# EAGLE board ATX_VGA_Analog_Board (EAGLE 9.6.2)
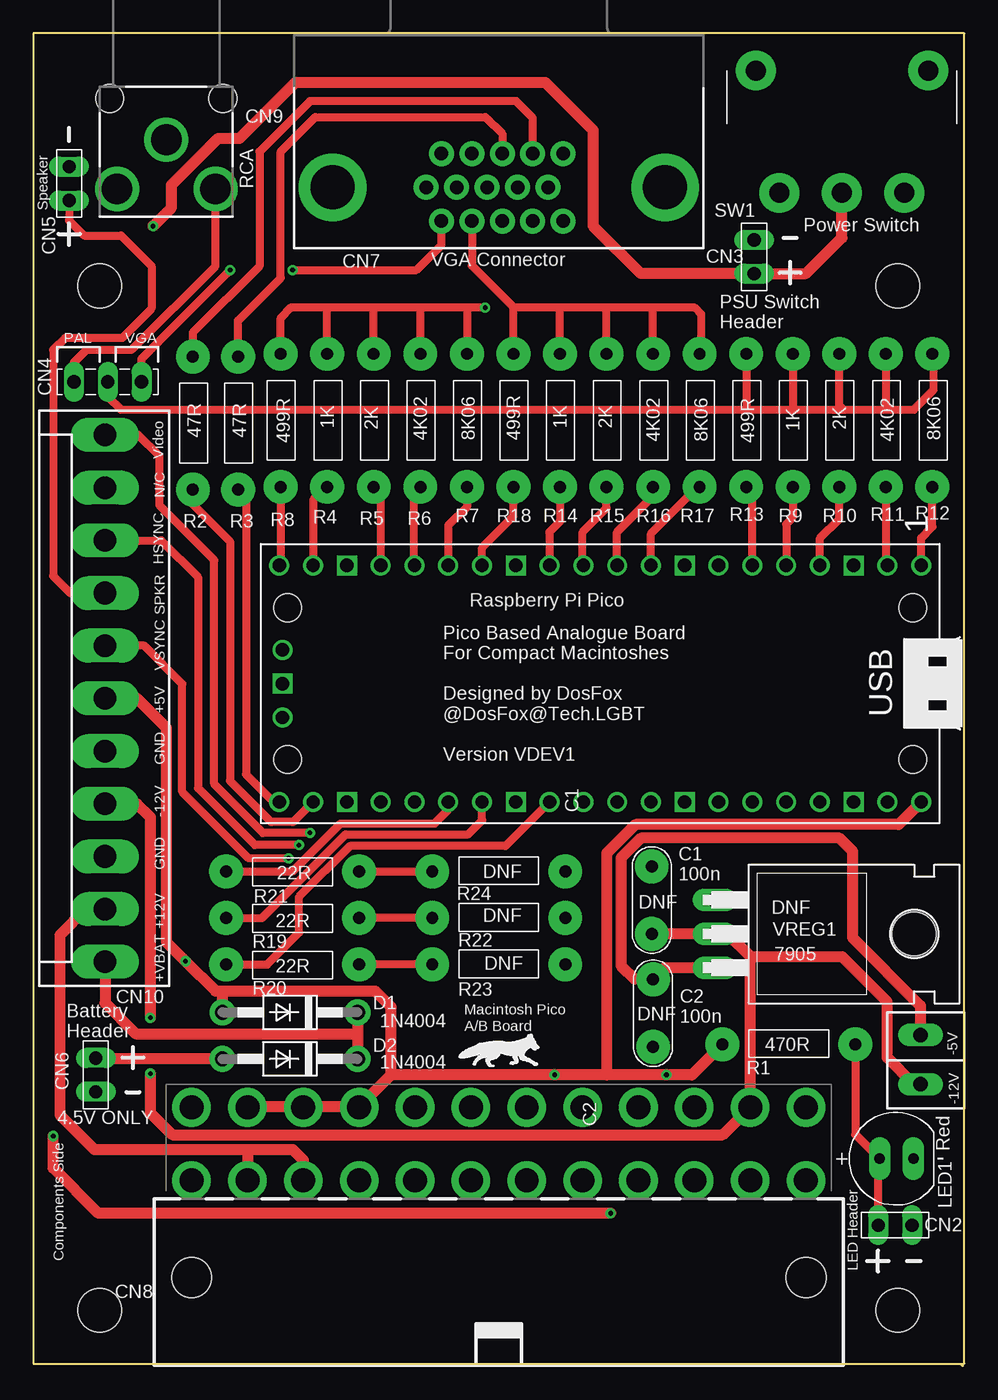
[diagram p0: board, top side]
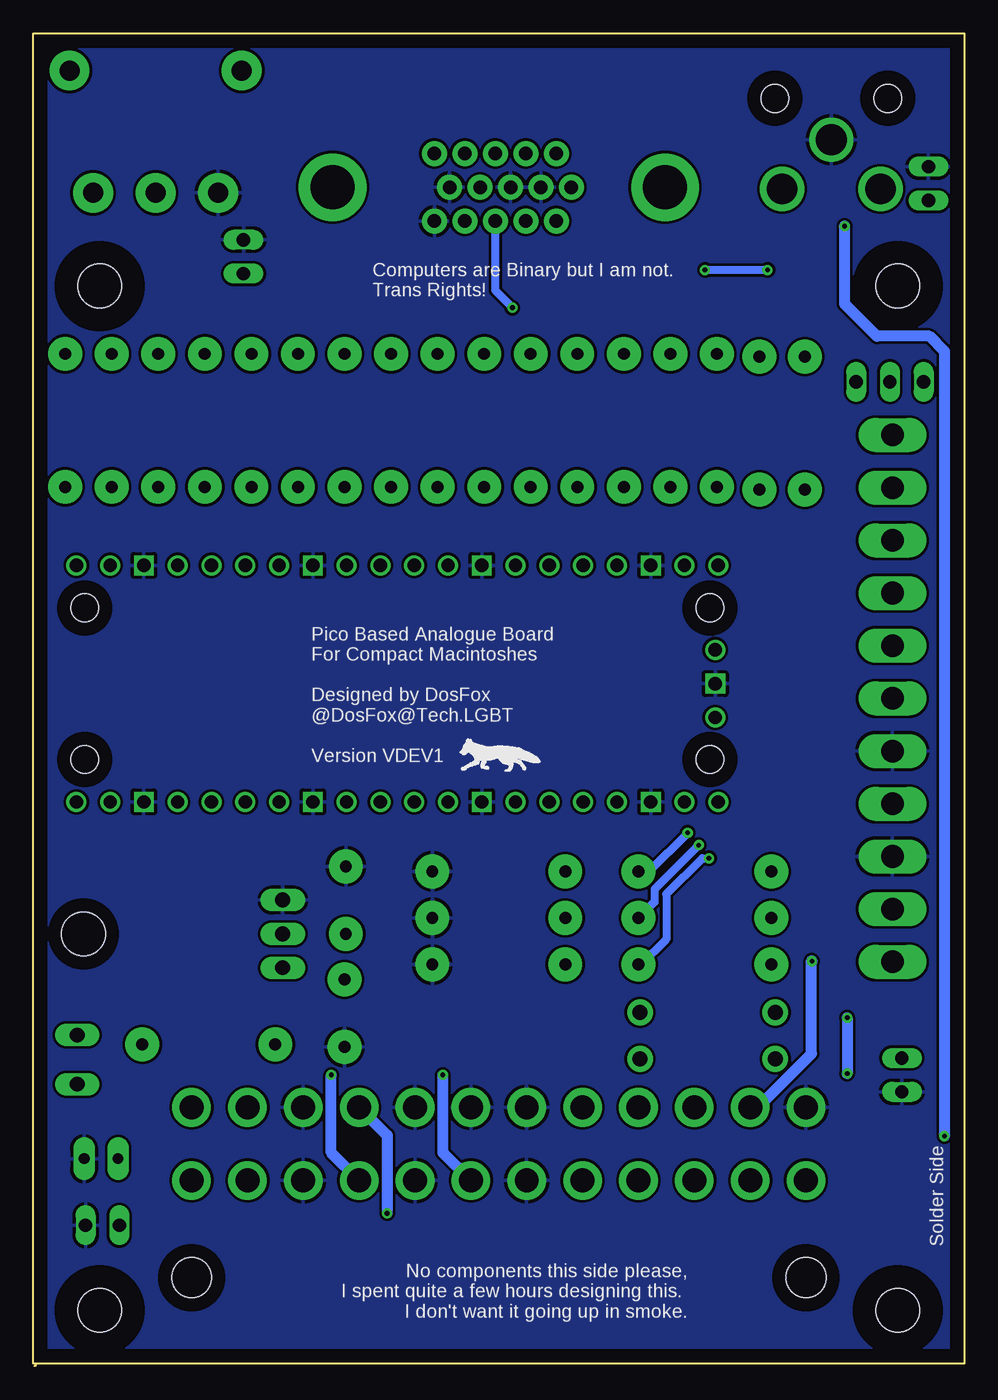
[diagram p1: board, bottom side, seen from below]

Size 70 x 100.2 mm. Coordinates in mm from the lower left corner, seen from the top.
Outline: 69.8,0.1 69.9,0
Outline: 0,0.2 70,0.2 70,100.2 0,100.2 0,0.2
Copper layers (1*16): Top 0.035mm / dielectric 1.5mm / Bottom 0.035mm
Design rules "default *": minimum track width 0.2mm, minimum drill 0.25mm, track to track 8mil, track to pad 8mil, pad to pad 8mil, via to via 8mil, smd to smd 8mil, copper to edge 40mil, drill to drill 8mil, minimum pad ring 1mil, minimum via ring 8mil, stop-mask expansion 4mil, vias tented up to drill 1mm, thermal gap 10mil
Holes 3.3 mm at 65,4.2 5,4.2 5,81.2 65,81.2
bRestrict: area 61.8,0.9 to 68.2,7.5; area 1.8,0.9 to 8.2,7.5; area 1.8,78 to 8.2,84.5; area 61.8,78 to 68.2,84.5

## Footprints (pad centres in the part's own frame; a part is rotated, then mirrored left to right if it is on the bottom)
CAP_5.08MM_PITCH = drill 0.9 pad 2.54: P$1 0,0; P$2 0,-5.08
PICO_SOCKET = drill 1: P1 0,48.26; P2 0,45.72; P4 0,40.64; P5 0,38.1; P6 0,35.56; P7 0,33.02; P9 0,27.94; P10 0,25.4; P11 0,22.86; P12 0,20.32; P14 0,15.24; P15 0,12.7; P16 0,10.16; P17 0,7.62; P19 0,2.54; P20 0,0; P21 17.78,0; P22 17.78,2.54; P24 17.78,7.62; P25 17.78,10.16; P26 17.78,12.7; P27 17.78,15.24; P29 17.78,20.32; P30 17.78,22.86; P31 17.78,25.4; P32 17.78,27.94; P34 17.78,33.02; P35 17.78,35.56; P36 17.78,38.1; P37 17.78,40.64; P39 17.78,45.72; P40 17.78,48.26; P41 6.35,0.23; P43 11.43,0.23 | drill 1 square: P3 0,43.18; P8 0,30.48; P13 0,17.78; P18 0,5.08; P23 17.78,5.08; P28 17.78,17.78; P33 17.78,30.48; P38 17.78,43.18; P42 8.89,0.23 | hole 2.1: 3.19,0.63; 14.59,0.63; 14.59,47.63; 3.19,47.63
2W_2.54MM_PITCH_VERT_TH = drill 1 pad 1.5 long: 1 -1.27,0; 2 1.27,0
3W_2.54MM_PITCH_VERT_TH = drill 1 long: 1 -2.54,0; 2 0,0; 3 2.54,0
DB15 = drill 1.016 pad 1.88: 1 -4.32,-7.62; 2 -2.03,-7.62; 3 0.26,-7.62; 4 2.55,-7.62; 5 4.84,-7.62; 6 -5.46,-5.08; 7 -3.17,-5.08; 8 -0.88,-5.08; 9 1.41,-5.08; 10 3.7,-5.08; 11 -4.32,-2.54; 12 -2.03,-2.54; 13 0.26,-2.54; 14 2.55,-2.54; 15 4.84,-2.54 | drill 3.302 pad 5.08: G1 -12.5,-5.08; G2 12.5,-5.08
ATX24_RIGHT_ANGLE = drill 1.8 pad 2.9: 1 23.1,4.76; 2 18.9,4.76; 3 14.7,4.76; 4 10.5,4.76; 5 6.3,4.76; 6 2.1,4.76; 7 -2.1,4.76; 8 -6.3,4.76; 9 -10.5,4.76; 10 -14.7,4.76; 11 -18.9,4.76; 12 -23.1,4.76; 13 23.1,10.26; 14 18.9,10.26; 15 14.7,10.26; 16 10.5,10.26; 17 6.3,10.26; 18 2.1,10.26; 19 -2.1,10.26; 20 -6.3,10.26; 21 -10.5,10.26; 22 -14.7,10.26; 23 -18.9,10.26; 24 -23.1,10.26 | hole 3: -23.1,-2.54; 23.1,-2.54
RCA = drill 2.3: PIN 3.7,3.7; SHELL 0,0; SWITCH 3.7,-3.7 | hole 2.1: -3.1,4.25; -3.1,-4.25
KK-156-11 = drill 1.7 pad 2.184 long: 1 -19.8,0; 2 -15.84,0; 3 -11.88,0; 4 -7.92,0; 5 -3.96,0; 6 0,0; 7 3.96,0; 8 7.92,0; 9 11.88,0; 10 15.84,0; 11 19.8,0
DO41-10 = drill 1.118 pad 1.93: A 5.08,0; C -5.08,0
5MM_TH_VERT_STANDARD = drill 0.8 pad 1.6 long: A 0,-1.27; C 0,1.27
RESISTORTHRUHOLE = drill 0.9 pad 2.54: P$1 0,0; P$2 10,0
1PIN = drill 1.1 pad 1.676 long: P$1 0,0
THRUHOLE90DEGSLIDESW = drill 1.5 pad 3: P$1 -4.7,-4.2; P$2 0,-4.2; P$3 4.7,-4.2; P$4 -6.475,5; P$5 6.475,5
TO220H = drill 1.118 long: 1 -2.54,-10.16; 2 0,-10.16; 3 2.54,-10.16 | hole 3.302: 0,4.826

## Placement (x,y rotation side)
A1  VDEV1  [PCB_CUSTOM_DETAILS]  -120.65,1.47 0 top  (outside the outline)
C1  100n 50V  [CAP_5.08MM_PITCH]  46.5,32.5 180 top
C2  100n 50V  [CAP_5.08MM_PITCH]  46.6,24 180 top
CN1  V06-1x20-SV-GF-1  [PICO_SOCKET]  18.5,60.2 270 top
CN2  2way  [2W_2.54MM_PITCH_VERT_TH]  64.8,10.6 180 top
CN3  2way  [2W_2.54MM_PITCH_VERT_TH]  54.2,83.4 270 top
CN4  V06-1x3-SV-GF-1  [3W_2.54MM_PITCH_VERT_TH]  5.6,74 180 top
CN5  2way  [2W_2.54MM_PITCH_VERT_TH]  2.7,88.9 270 top
CN6  2way  [2W_2.54MM_PITCH_VERT_TH]  4.7,21.9 90 top
CN7  DB15  [DB15]  35,93.7 0 top
CN8  ATX24RH  [ATX24_RIGHT_ANGLE]  35,9.2 0 top
CN9  RCA  [RCA]  10,92.2 270 top
CN10  [KK-156-11]  5.4,50.2 90 top
D1  1N4004  [DO41-10]  19.3,26.6 180 top
D2  1N4004  [DO41-10]  19.3,23.1 180 top
LED1  Red  [5MM_TH_VERT_STANDARD]  64.9,15.6 270 top
R1  470R  [RESISTORTHRUHOLE]  61.8,24.2 180 top
R2  47R  [RESISTORTHRUHOLE]  12,65.9 90 top
R3  47R  [RESISTORTHRUHOLE]  15.4,65.9 90 top
R4  1k  [RESISTORTHRUHOLE]  22.1,66.1 90 top
R5  2k  [RESISTORTHRUHOLE]  25.6,66.1 90 top
R6  4k02  [RESISTORTHRUHOLE]  29.1,66.1 90 top
R7  8k06  [RESISTORTHRUHOLE]  32.6,66.1 90 top
R8  499R  [RESISTORTHRUHOLE]  18.6,66.1 90 top
R9  1k  [RESISTORTHRUHOLE]  57.1,66.1 90 top
R10  2k  [RESISTORTHRUHOLE]  60.6,66.1 90 top
R11  4k02  [RESISTORTHRUHOLE]  64.1,66.1 90 top
R12  8k06  [RESISTORTHRUHOLE]  67.6,66.1 90 top
R13  499R  [RESISTORTHRUHOLE]  53.6,66.1 90 top
R14  1k  [RESISTORTHRUHOLE]  39.6,66.1 90 top
R15  2k  [RESISTORTHRUHOLE]  43.1,66.1 90 top
R16  4k02  [RESISTORTHRUHOLE]  46.6,66.1 90 top
R17  8k06  [RESISTORTHRUHOLE]  50.1,66.1 90 top
R18  499R  [RESISTORTHRUHOLE]  36.1,66.1 90 top
R19  22R  [RESISTORTHRUHOLE]  14.5,33.7 0 top
R20  22R  [RESISTORTHRUHOLE]  14.5,30.2 0 top
R21  22R  [RESISTORTHRUHOLE]  14.5,37.2 0 top
R22  DNF  [RESISTORTHRUHOLE]  40,33.7 180 top
R23  DNF  [RESISTORTHRUHOLE]  40,30.2 180 top
R24  DNF  [RESISTORTHRUHOLE]  40,37.2 180 top
SP1  1PIN  [1PIN]  66.7,24.9 180 top
SP2  1PIN  [1PIN]  66.7,21.2 180 top
SW1  SS12D16-GDN5  [THRUHOLE90DEGSLIDESW]  60.8,92.4 0 top
VREG1  [TO220H]  61.4,32.5 270 top

## Library data of the parts
A1 = Schematic Symbols
C1 C2 = Capacitors TH; COMPONENT: Capacitor; COST: =(INDIRECT(ADDRESS(ROW(),1)))*(INDIRECT(ADDRESS(ROW(),13))); EA: =VLOOKUP(INDIRECT(ADDRESS(ROW(),7)),[ProductCosts.xlsx]StockCosts!$A:$B,2,FALSE); KPN: 3101-100N; PACKAGE: 5.08mm PITCH; PROCESS: TH
CN1 = uProcessor; COMPONENT: Pico Connector; COST: =(INDIRECT(ADDRESS(ROW(),1)))*(INDIRECT(ADDRESS(ROW(),13)))*2; DATASHEET: https://www.toby.co.uk/uploads/publications/2009.pdf; DETAILS: BOARD REQUIRES 2 CONNECTORS; EA: =VLOOKUP(INDIRECT(ADDRESS(ROW(),7)),[ProductCosts.xlsx]StockCosts!$A:$B,2,FALSE); KPN: 4189; PACKAGE: 2.54mm 20-way; PROCESS: TH
CN2 CN3 CN5 CN6 = Connectors; COMPONENT: Pin Header (36way); COST: =(INDIRECT(ADDRESS(ROW(),1)))*(INDIRECT(ADDRESS(ROW(),13))); EA: =(VLOOKUP(INDIRECT(ADDRESS(ROW(),6)),'[ProductCosts.xlsx]StockCosts'!$A:$B,2,FALSE)/(36/(LEFT(INDIRECT(ADDRESS(ROW(),8)),SUM(LEN(INDIRECT(ADDRESS(ROW(),8)))-LEN(SUBSTITUTE(INDIRECT(ADDRESS(ROW(),8)),{"0","1","2","3","4","5","6","7","8","9"},""))))))); KPN: 4133; PACKAGE: 2.54mm pitch; PROCESS: TH
CN4 = Connectors; COMPONENT: Pin Header Socket (3 Way); COST: =(INDIRECT(ADDRESS(ROW(),1)))*(INDIRECT(ADDRESS(ROW(),13))); DATASHEET: https://www.toby.co.uk/uploads/publications/2009.pdf; EA: =VLOOKUP(INDIRECT(ADDRESS(ROW(),7)),[ProductCosts.xlsx]StockCosts!$A:$B,2,FALSE); KPN: 4182; MANUFACTURE: Toby; PACKAGE: 2.54mm Pitch; PROCESS: TH
CN7 = SparkFun-Retired
CN8 = SparkFun-Connectors; PROD_ID: CONN-09674; SF_ID: PRT-09498
CN9 = SparkFun-Connectors; PROD_ID: CONN-09081; SF_ID: PRT-08631
CN10 = con-molex; MF: MOLEX; OC_FARNELL: unknown; OC_NEWARK: unknown
D1 D2 = adafruit
LED1 = Optoelectronics; COMPONENT: LED; COST: =(INDIRECT(ADDRESS(ROW(),1)))*(INDIRECT(ADDRESS(ROW(),13))); EA: =VLOOKUP(INDIRECT(ADDRESS(ROW(),7)),[ProductCosts.xlsx]StockCosts!$A:$B,2,FALSE); KPN: 3504; PACKAGE: 5mm Dia; PROCESS: TH
R1 R8 R13 R18 = Resistors TH; COMPONENT: Resistor; COST: =(INDIRECT(ADDRESS(ROW(),1)))*(INDIRECT(ADDRESS(ROW(),13))); EA: =(VLOOKUP(INDIRECT(ADDRESS(ROW(),6)),[ProductCosts.xlsx]StockCosts!$A:$B,2,FALSE))/1000; KPN: 3004-470R; PACKAGE: Axial Leaded; PROCESS: TH
R2 R3 = Resistors TH; COMPONENT: Resistor; COST: =(INDIRECT(ADDRESS(ROW(),1)))*(INDIRECT(ADDRESS(ROW(),13))); EA: =(VLOOKUP(INDIRECT(ADDRESS(ROW(),6)),[ProductCosts.xlsx]StockCosts!$A:$B,2,FALSE))/1000; KPN: 3004-47R; PACKAGE: Axial Leaded; PROCESS: TH
R4 R9 R14 = Resistors TH; COMPONENT: Resistor; COST: =(INDIRECT(ADDRESS(ROW(),1)))*(INDIRECT(ADDRESS(ROW(),13))); EA: =(VLOOKUP(INDIRECT(ADDRESS(ROW(),6)),[ProductCosts.xlsx]StockCosts!$A:$B,2,FALSE))/1000; KPN: 3004-1k; PACKAGE: Axial Leaded; PROCESS: TH
R5 R10 R15 = Resistors TH; COMPONENT: Resistor; COST: =(INDIRECT(ADDRESS(ROW(),1)))*(INDIRECT(ADDRESS(ROW(),13))); EA: =(VLOOKUP(INDIRECT(ADDRESS(ROW(),6)),[ProductCosts.xlsx]StockCosts!$A:$B,2,FALSE))/1000; KPN: 3004-2k2; PACKAGE: Axial Leaded; PROCESS: TH
R6 R11 R16 = Resistors TH; COMPONENT: Resistor; COST: =(INDIRECT(ADDRESS(ROW(),1)))*(INDIRECT(ADDRESS(ROW(),13))); EA: =(VLOOKUP(INDIRECT(ADDRESS(ROW(),6)),[ProductCosts.xlsx]StockCosts!$A:$B,2,FALSE))/1000; KPN: 3004-4k7; PACKAGE: Axial Leaded; PROCESS: TH
R7 R12 R17 = Resistors TH; COMPONENT: Resistor; COST: =(INDIRECT(ADDRESS(ROW(),1)))*(INDIRECT(ADDRESS(ROW(),13))); EA: =(VLOOKUP(INDIRECT(ADDRESS(ROW(),6)),[ProductCosts.xlsx]StockCosts!$A:$B,2,FALSE))/1000; KPN: 3004-68k; PACKAGE: Axial Leaded; PROCESS: TH
R19-R24 = Resistors TH; COMPONENT: Resistor; COST: =(INDIRECT(ADDRESS(ROW(),1)))*(INDIRECT(ADDRESS(ROW(),13))); EA: =(VLOOKUP(INDIRECT(ADDRESS(ROW(),6)),[ProductCosts.xlsx]StockCosts!$A:$B,2,FALSE))/1000; KPN: 3004-22R; PACKAGE: Axial Leaded; PROCESS: TH
SP1 SP2 = generic parts
SW1 = Switches; COMPONENT: Switch; COST: =(INDIRECT(ADDRESS(ROW(),1)))*(INDIRECT(ADDRESS(ROW(),13))); EA: =VLOOKUP(INDIRECT(ADDRESS(ROW(),7)),[ProductCosts.xlsx]StockCosts!$A:$B,2,FALSE); KPN: 3415; PROCESS: TH
VREG1 = linear

## Nets
+5V: CN1.P40 CN8.4 CN8.6 CN8.21 CN8.22 CN8.23 CN10.6 D1.A R1.P$2
+12V: CN8.10 CN8.11 CN10.2
+BAT: CN6.2 D2.A
+VBAT: CN10.1 D1.C D2.C
-5V: C2.P$2 SP1.P$1 VREG1.3
-12V: C1.P$1 CN8.14 CN10.4 SP2.P$1 VREG1.2
BLUE: CN7.3 R4.P$2 R5.P$2 R6.P$2 R7.P$2 R8.P$2
COMPOSITE_VIDEO: CN4.3 CN9.PIN
GND: C1.P$2 C2.P$1 CN1.P3 CN1.P8 CN1.P13 CN1.P18 CN1.P23 CN1.P28 CN1.P33 CN1.P38 CN1.P42 CN2.1 CN3.1 CN5.1 CN6.1 CN7.5 CN7.7 CN7.8 CN7.10 CN8.3 CN8.5 CN8.7 CN8.15 CN8.17 CN8.18 CN8.19 CN8.24 CN9.SHELL CN10.3 CN10.5 LED1.C R22.P$1 R23.P$1 R24.P$1 SW1.P$1 VREG1.1
GPIO0: CN1.P1 R12.P$1
GPIO1: CN1.P2 R11.P$1
GPIO2: CN1.P4 R10.P$1
GPIO3: CN1.P5 R9.P$1
GPIO4: CN1.P6 R13.P$1
GPIO5: CN1.P7
GPIO6: CN1.P9 R17.P$1
GPIO7: CN1.P10 R16.P$1
GPIO8: CN1.P11 R15.P$1
GPIO9: CN1.P12 R14.P$1
GPIO10: CN1.P14 R18.P$1
GPIO11: CN1.P15 R7.P$1
GPIO12: CN1.P16 R6.P$1
GPIO13: CN1.P17 R5.P$1
GPIO14: CN1.P19 R4.P$1
GPIO15: CN1.P20 R8.P$1
GREEN: CN7.2 R14.P$2 R15.P$2 R16.P$2 R17.P$2 R18.P$2
MAC-HSYNC: CN10.9 R19.P$2 R22.P$2
MAC-VIDEO: CN10.11 R21.P$2 R24.P$2
MAC-VSYNC: CN10.7 R20.P$2 R23.P$2
N$1: CN2.2 LED1.A R1.P$1
N$2: CN1.P22 R2.P$1
N$3: CN1.P21 R3.P$1
N$4: CN1.P29 R20.P$1
N$5: CN1.P27 R19.P$1
N$6: CN1.P26 R21.P$1
POWER_SWITCH: CN3.2 CN8.16 SW1.P$2
RED: CN4.1 CN7.1
SPEAKER: CN5.2 CN10.8
SWITCHED_RED: CN4.2 R9.P$2 R10.P$2 R11.P$2 R12.P$2 R13.P$2
VGA-HSYNC: CN7.13 R3.P$2
VGA-VSYNC: CN7.14 R2.P$2

## Tracks (layer width: path | path; a pad name or v marks a point on that pad's centre or on a via)
+5V  (via drill 0.35)
  Top 0.813: 26.9,21.9 24.5,19.5 CN8.21 24.46,19.5 20.34,19.5 CN8.22 20.26,19.5 16.14,19.5 CN8.23 | 26.9,21.9 26.9,27 25.7,28.2 14.22,28.2 | D1.A 14.22,28.2 | CN1.P40 65.06,40.72 45.27,40.72 43.1,38.55 43.1,21.9 | CN10.6 7.8,50.2 10,48 10,31.9 v11.45,30.45 13.7,28.2 14.22,28.2 | R1.P$2 49.5,21.9 v47.6,21.9 43.1,21.9 | 43.1,21.9 v39.2,21.9 26.9,21.9
  Bottom 0.813: CN8.6 39.2,16.06 v39.2,21.9 | CN8.4 47.6,16.06 v47.6,21.9 | CN8.23 16.07,19.43 15.57,19.43 11.5,23.49 11.5,30.5 v11.45,30.45
+12V
  Top 0.813: CN10.2 3.96,34.36 2,32.4 2,18.9 4.6,16.3 16,16.3 | 16,16.3 16.1,16.2 CN8.11 | 16,16.3 19.5,16.3 20.3,15.5 CN8.10
+BAT
  Top 0.813: D2.A 4.77,23.1 CN6.2
+VBAT
  Top 0.813: CN10.1 5.4,27.3 7.7,25 24.18,25 24.38,25.2 | D1.C 24.38,25.2 | 24.38,25.2 D2.C
-5V
  Top 0.61: 45.22,29.08 C2.P$2
  Top 0.813: VREG1.3 47.48,29.96 C2.P$2 | 45.22,29.08 44.2,30.1 44.2,38.21 45.69,39.7 60.6,39.7 61.6,38.7 61.6,32.2 66.7,27.1 SP1.P$1
-12V  (via drill 0.35)
  Top 0.813: SP2.P$1 66.2,21.2 64.2,23.2 64.2,27.4 60.8,30.8 53.9,30.8 | CN10.4 7.79,42.28 8.8,41.29 v8.8,26.2 | v8.8,22 8.8,19.05 10.45,17.4 51.84,17.4 CN8.14 53.9,30.8 | 53.9,30.8 52.2,32.5 VREG1.2 C1.P$1
  Bottom 0.813: v8.8,26.2 v8.8,22
BLUE  (via drill 0.35)
  Top 0.61: R8.P$2 18.6,78.8 19.4,79.6 21.9,79.6 | 21.9,79.6 25.4,79.6 | 25.4,79.6 29.2,79.6 | 29.2,79.6 32.6,79.6 | 32.6,79.6 R7.P$2 | R6.P$2 29.1,79.5 29.2,79.6 | R5.P$2 25.6,79.4 25.4,79.6 | R4.P$2 22.1,79.4 21.9,79.6 | 32.6,79.6 34,79.6 v33.97,79.57
  Bottom 0.61: v33.97,79.57 35.26,80.86 CN7.3
COMPOSITE_VIDEO
  Top 0.61: CN9.PIN 13.7,82.7 7.4,76.4 4,76.4 3.06,75.46 CN4.3
GND
  pour Bottom: 0,100.2 0.1,0.1 70,0.2 70,100.2
GPIO0
  Top 0.61: CN1.P1 66.76,62.26 67.6,63.1 R12.P$1
GPIO1
  Top 0.61: R11.P$1 64.1,60.32 CN1.P2
GPIO2
  Top 0.61: CN1.P4 59.14,62.24 60.6,63.7 R10.P$1
GPIO3
  Top 0.61: R9.P$1 57.1,63.8 56.6,63.3 CN1.P5
GPIO4
  Top 0.61: CN1.P6 54.06,65.64 R13.P$1
GPIO6
  Top 0.61: CN1.P9 46.44,62.6 49.94,66.1 R17.P$1
GPIO7
  Top 0.61: CN1.P10 43.9,62.7 46.6,65.4 R16.P$1
GPIO8
  Top 0.61: CN1.P11 41.3,60.26 41.3,62.7 43.1,64.5 R15.P$1
GPIO9
  Top 0.61: R14.P$1 39.6,63.5 38.8,62.7 38.8,60.22 CN1.P12
GPIO10
  Top 0.61: CN1.P14 33.74,61.54 36.1,63.9 R18.P$1
GPIO11
  Top 0.61: R7.P$1 32.6,64.6 31.2,63.2 CN1.P15
GPIO12
  Top 0.61: R6.P$1 29,66.1 28.6,65.7 28.6,60.26 CN1.P16
GPIO13
  Top 0.61: CN1.P17 26.12,65.58 R5.P$1
GPIO14
  Top 0.61: CN1.P19 21.04,65.14 22,66.1 R4.P$1
GPIO15
  Top 0.61: R8.P$1 18.6,60.3 CN1.P20
GREEN
  Top 0.61: R18.P$2 36.1,79.6 | 36.1,79.6 39.7,79.6 | 39.7,79.6 43,79.6 | 43,79.6 46.6,79.6 | 46.6,79.6 49.7,79.6 50.2,79.1 50.2,76.2 R17.P$2 | R16.P$2 46.6,79.6 | R15.P$2 43.1,79.5 43,79.6 | R14.P$2 39.6,79.5 39.7,79.6 | CN7.2 32.97,82.73 36.1,79.6
MAC-HSYNC  (via drill 0.35)
  Top 0.61: R22.P$2 R19.P$2 | CN10.9 9.62,62.08 12.39,59.31 12.39,43.46 16.68,39.17 v19.97,39.17
  Bottom 0.61: R19.P$2 23.3,34.9 23.3,35.84 v19.97,39.17
MAC-VIDEO  (via drill 0.35)
  Top 0.61: R21.P$2 R24.P$2 | v20.8,40.1 20.79,40.09 17.26,40.09 13.6,43.75 13.6,60.6 9.5,64.7 9.5,68.4 7.9,70 CN10.11
  Bottom 0.61: R21.P$2 23.7,37.2 v20.8,40.1
MAC-VSYNC  (via drill 0.35)
  Top 0.61: R23.P$2 R20.P$2 | v19.2,38.19 16.2,38.19 11.2,43.19 11.2,51.3 8.34,54.16 CN10.7
  Bottom 0.61: R20.P$2 24.3,30.2 22.4,32.1 22.4,35.49 19.7,38.19 v19.2,38.19
N$1
  Top 0.61: R1.P$1 61.8,17.43 LED1.A 63.53,15.5 CN2.2
N$2
  Top 0.61: CN1.P22 19.52,40.9 17.9,40.9 14.8,44 14.8,62 12,64.8 R2.P$1
N$3
  Top 0.61: R3.P$1 16,65.3 16,44.5 18.08,42.42 CN1.P21
N$4
  Top 0.61: R20.P$1 17.6,30.2 20,32.6 20,35.3 23.8,39.1 35.5,39.1 CN1.P29
N$5
  Top 0.61: R19.P$1 17.2,33.7 23.49,39.99 32.69,39.99 33.74,41.04 CN1.P27
N$6
  Top 0.61: CN1.P26 31.2,41.82 30.18,40.8 23.1,40.8 19.5,37.2 R21.P$1
POWER_SWITCH  (via drill 0.35)
  Top 0.813: SW1.P$2 60.77,88.17 60.77,84.83 60.8,84.83 58.1,82.13 CN3.2 45.67,82.13 42.09,85.71 42.09,92.9 38.48,96.51 19.72,96.51 15.51,92.3 13.9,92.3 10.4,88.8 10.4,87.1 v9,85.7 | v43.4,11.5 4.9,11.5 1.5,14.9 v1.5,17.3
  Bottom 0.813: CN8.16 43.4,17.36 v43.4,11.5 | v1.5,17.3 1.5,76.3 2.62,77.42 6.57,77.42 9,79.85 v9,85.7
RED  (via drill 0.35)
  Top 0.61: CN4.1 8.14,75.74 v14.8,82.4 | v19.5,82.4 28.8,82.4 30.68,84.28 CN7.1
  Bottom 0.61: v14.8,82.4 v19.5,82.4
SPEAKER
  Top 0.61: CN10.8 2.78,58.12 1.5,59.4 1.5,76.4 2.4,77.3 6.7,77.3 8.9,79.5 8.9,82.7 6.6,85 3.83,85 2.7,86.13 CN5.2
SWITCHED_RED
  Top 0.61: CN4.2 5.6,72.9 6.6,71.9 53.6,71.9 | R12.P$2 67.7,76 67.7,73.4 66.2,71.9 64.1,71.9 | 53.6,71.9 57,71.9 | 57,71.9 60.9,71.9 | 60.9,71.9 64.1,71.9 | R11.P$2 64.1,71.9 | 60.9,71.9 60.6,72.2 R10.P$2 | R9.P$2 57.1,72 57,71.9 | R13.P$2 53.6,71.9
VGA-HSYNC
  Top 0.61: R3.P$2 15.4,78.6 18.6,81.8 18.6,91.3 21.2,93.9 34,93.9 35.26,92.64 CN7.13
VGA-VSYNC
  Top 0.61: CN7.14 37.55,93.85 36.3,95.1 20.8,95.1 17,91.3 17,82.7 12,77.7 R2.P$2

## Text on the board
tNames: Speaker | Power Switch | VGA Connector | PSU Switch / Header | PAL | VGA | 47R | 47R | 1K | 2K | 1K | 2K | 1K | 2K | 499R | 4K02 | 8K06 | 499R | 4K02 | 8K06 | 499R | 4K02 | 8K06 | Video | N/C | HSYNC | Raspberry Pi Pico | SPKR | VSYNC | +5V | GND | Pico Based Analogue Board / For Compact Macintoshes / / Designed by DosFox / @DosFox@Tech.LGBT / / Version VDEV1 | -12V | GND | 22R | DNF | C1 / 100n | DNF | DNF | +12V | 22R | DNF | DNF | 7905 | +VBAT | 22R | DNF | C2 / 100n | Macintosh Pico / A/B Board | Battery / Header | 470R | -5V | -12V | 4.5V ONLY | Components Side | LED Header
bNames: Computers are Binary but I am not. / Trans Rights! | Pico Based Analogue Board / For Compact Macintoshes / / Designed by DosFox / @DosFox@Tech.LGBT / / Version VDEV1 | Solder Side | No components this side please, / I spent quite a few hours designing this. / I don't want it going up in smoke.
tDocu: ATX VGA Analog Board | Yes | Yes | 40mm x 54.5mm | Yes | 2 | Yes | Yes | Yes | No | HASL (Lead Free) | Yes | Blue (Both Sides) | Yes | White (Both Sides) | Yes | Yes | Yes | No | No | No